# Altium PCB FD-JUL-CB1_PCB.PcbDoc
Units mm, origin at the board's own origin, x right, y up, seen from the top; angles counter-clockwise.
Board outline 11.43 x 8.89 mm, 4 copper layers (Top Layer, Int1 (GND), Layer 1, Bottom Layer), stack 0.752 mm thick; 20 components, 23 nets, 82 pads, 32 vias.
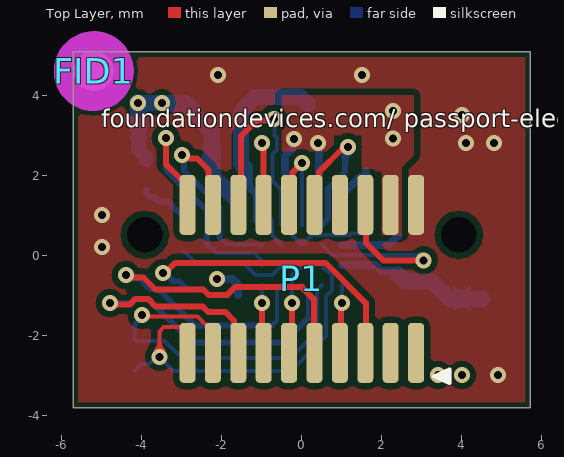
[diagram p0: Top Layer view]
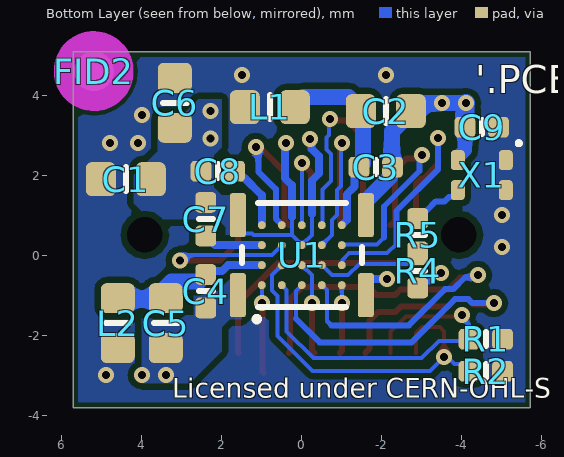
[diagram p1: Bottom Layer view, seen from below]
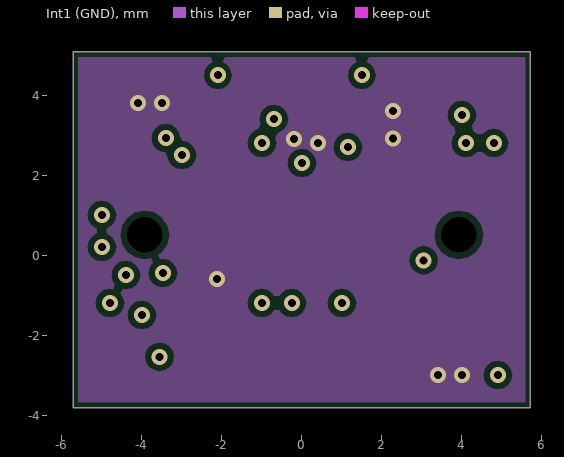
[diagram p2: Int1 (GND)]
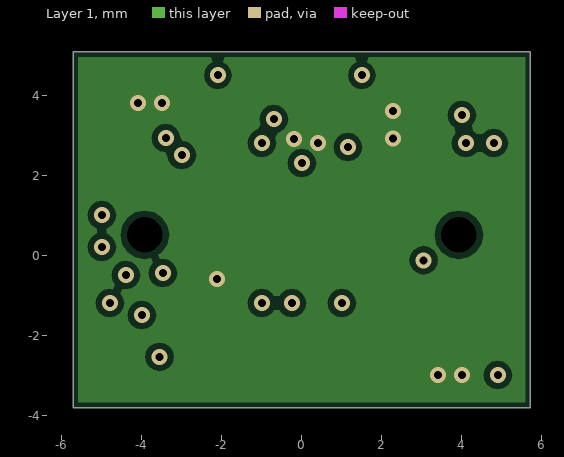
[diagram p3: Layer 1]
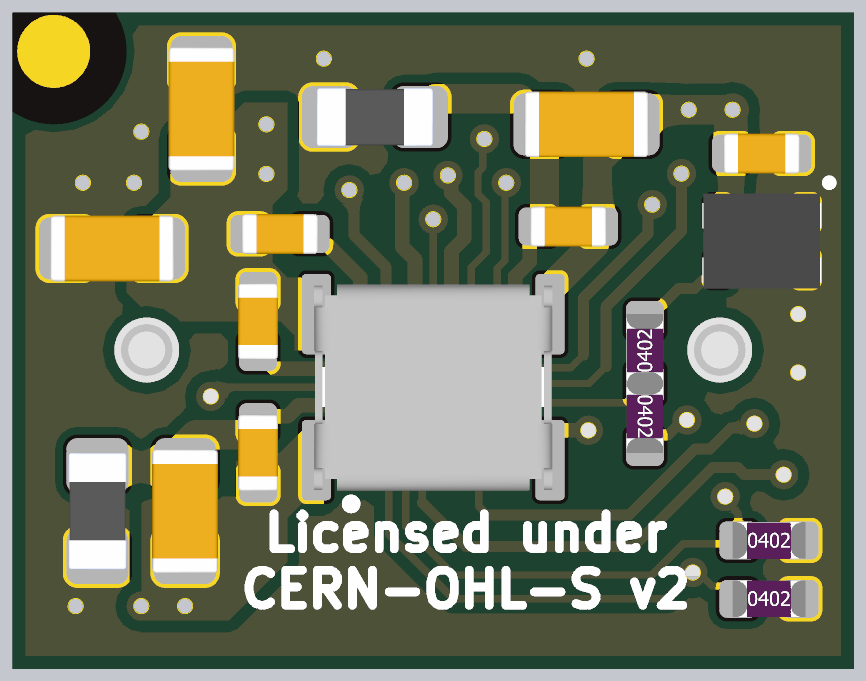
[diagram p4: 3D render of the assembled board from below, using the file's embedded part models]

## Layer stack, top to bottom
Top Solder: solder mask 0.0178, SM-001, Dk 3.9
Top Layer: signal copper 0.0152
Dielectric 1: prepreg 0.0848, PP-017, Dk 3.77
Int1 (GND): signal copper 0.033
Dielectric 3: core 0.4856, Core-039, Dk 4.25
Layer 1: signal copper 0.033
Dielectric 2: prepreg 0.0848, PP-017, Dk 3.77
Bottom Layer: signal copper 0.0152
Bottom Solder: solder mask 0.0178, SM-001, Dk 3.9

## Board outline
-5.715,-3.81 5.715,-3.81 5.715,5.08 -5.715,5.08

## Design rules (kind name [scope] priority, off if disabled: settings)
Clearance Fiducials [InComponent('FID1') or InComponent('FID2') or InComponent('FID3') or InComponent('FID5') or InComponent('FID4') or InComponent('FID6')] p1: gap=0.1 ignorepadtopadclearanceinfootprint=FALSE except(0: Arc-SMDPad) // Self violation of pad and keepout.
Clearance [All] p2: gap=0.1 ignorepadtopadclearanceinfootprint=FALSE except(0.15: Arc-Fill Arc-Poly Arc-Region Track-Fill Track-Poly Track-Region SMDPad-Fill SMDPad-Poly SMDPad-Region THPad-Fill THPad-Poly THPad-Region Via-Fill Via-Poly Via-Region Fill-Fill Fill-Poly Fill-Region Poly-Poly Poly-Region Region-Region)
ComponentClearance "R4 & R5" [InComponent('R4') vs InComponent('R5')] p1: gap=-1 collisioncheckmode=3 verticalgap=-1 showdistances=FALSE // Routing Select Resistors
ComponentClearance [All] p2: gap=0.1 collisioncheckmode=3 verticalgap=0.1 showdistances=FALSE
DiffPairsRouting [All] p1: maxlimit=0.3 minlimit=0.1 mostfreqgap=0.2 toplayer_minwidth=0.1 toplayer_maxwidth=0.3 toplayer_prefwidth=0.2 midlayer1_minwidth=0.1 midlayer1_maxwidth=0.3 midlayer1_prefwidth=0.2 midlayer2_minwidth=0.1 midlayer2_maxwidth=0.3 midlayer2_prefwidth=0.2 bottomlayer_minwidth=0.1 bottomlayer_maxwidth=0.3 bottomlayer_prefwidth=0.2 maxuncoupledlength=12.7
HoleSize [All] p1: absolutevalues=TRUE maxlimit=7.62 minlimit=0.2 maxpercent=80.000 minpercent=20.000
HoleToHoleClearance [All] p1: gap=0.1 allowstackedmicrovias=TRUE
MinimumAnnularRing [All] p1: minimumring=0.1
MinimumSolderMaskSliver [All] p1: minsoldermaskwidth=0.1
PlaneClearance [All] p1: clearance=0.203
PlaneConnect [All] p1: pad.planeconnectstyle=Relief pad.reliefexpansion=0.508 pad.reliefentries=4 pad.reliefconductorwidth=0.254 pad.reliefairgap=0.254 via.planeconnectstyle=Direct via.reliefexpansion=0.508 via.reliefentries=4 via.reliefconductorwidth=0.254 via.reliefairgap=0.254
PolygonConnect [All] p1: thpad.connectstyle=Relief thpad.reliefconductorwidth=0.254 thpad.reliefentries=4 thpad.polygonreliefangle="90 Angle" thpad.airgapwidth=0.254 smdpad.connectstyle=Direct smdpad.reliefconductorwidth=0.254 smdpad.reliefentries=4 smdpad.polygonreliefangle="90 Angle" smdpad.airgapwidth=0.254 via.connectstyle=Direct via.reliefconductorwidth=0.254 via.reliefentries=4 via.polygonreliefangle="90 Angle" via.airgapwidth=0.254
RoutingCorners [All] p1: cornerstyle=45-Degree minsetback=0.2 maxsetback=2
RoutingVias [All] p1: holewidth=0.3 width=0.6 viastyle="Through Hole" minholewidth=0.2 minwidth=0.4 maxholewidth=0.4 maxwidth=0.8
SMDNeckDown [All] p1: percent=100.000
SilkToSilkClearance [All] p1: silktosilkclearance=0.1
SilkToSolderMaskClearance SilkscreenOverComponentPads [IsPad] p1: minsilkscreentomaskgap=0.085 clearancetoexposedcopper=TRUE
SolderMaskExpansion [All] p1: expansion=0.05 istentingtop=FALSE
Width [All] p1: maxlimit=1 minlimit=0.1 preferedwidth=0.1
20 further rules are at their usual default settings.

## Classes and differential pairs
component class Title: PCB1
net class DCMI_D[7..0]: DCMI_D0 DCMI_D1 DCMI_D2 DCMI_D3 DCMI_D4 DCMI_D5 DCMI_D6 DCMI_D7
component class U_Connector: FID1 FID2 P1
component class U_Camera: C1 C2 C3 C4 C5 C6 C7 C8 C9 L1 L2 R1 R2 R4 R5 U1 X1

## Components (designator, comment, footprint, x,y, rotation, side; value= is the part's Value field where it differs from the comment)
C1 "CAP CER 4.7uF 16V 10% X5R 0603" CAPC0603(1608)90_L 4.4,1.9 r180 bottom
C2 "CAP CER 4.7uF 16V 10% X5R 0603" CAPC0603(1608)90_L -2.1,3.6 r180 bottom
C3 "CAP CER 0.1uF 16V 10% X7R 0402" CAPC0402(1005)55_L -1.85,2.2 r180 bottom
C4 "CAP CER 0.1uF 16V 10% X7R 0402" CAPC0402(1005)55_L 2.4,-0.9 r270 bottom
C5 "CAP CER 4.7uF 16V 10% X5R 0603" CAPC0603(1608)90_L 3.4,-1.7 r270 bottom
C6 "CAP CER 4.7uF 16V 10% X5R 0603" CAPC0603(1608)90_L 3.175,3.81 r270 bottom
C7 "CAP CER 0.1uF 16V 10% X7R 0402" CAPC0402(1005)55_L 2.4,0.9 r90 bottom
C8 "CAP CER 0.1uF 16V 10% X7R 0402" CAPC0402(1005)55_L 2.1,2.1 r0 bottom
C9 "CAP CER 0.1uF 16V 10% X7R 0402" CAPC0402(1005)55_L -4.5,3.2 r0 bottom
FID1 "FID1X2R" FID1X2R -5.2,4.6 r90 top
FID2 "FID1X2R" FID1X2R 5.2,4.6 r90 bottom
L1 "BLM18PG221SH1D" FBC0603(1608)90_L 0.8,3.7 r180 bottom
L2 "BLM18PG221SH1D" FBC0603(1608)90_L 4.6,-1.7 r270 bottom
P1 "LSS-110-02-L-DV-A-K" "SMTC - LSS-110-02-L-DV-A_V" 0,-0.592 r0 top
R1 "RES 4.7K 1/16W 1% 0402" RESC0402(1005)_L -4.6,-2.1 r180 bottom
R2 "RES 4.7K 1/16W 1% 0402" RESC0402(1005)_L -4.6,-2.9 r180 bottom
R4 "RES 0 OHM JUMPER 1/16W 0402" RESC0402(1005)_L -2.9,-0.4 r270 bottom locked
R5 "RES 0 OHM JUMPER 1/16W 0402" RESC0402(1005)_L -2.9,0.5 r90 bottom locked
U1 "OVM7690-RYAA" "OMNI - CCBGA-CG-20" 0,0 r90 bottom
X1 "DSC6001HE2A-024.0000" "MCHP - VFLGA-1612-4_L" -4.5,2 r270 bottom

## Footprints (in the part's own frame and the unit in brackets; to place one, negate y for a bottom-side part, rotate by r counter-clockwise, add the part's x,y. Pads: shape width x height; smd on the part's side, far side on the other; paste and mask are expansions set on the pad)
CAPC0402(1005)55_L [mm] "Chip Capacitor, 2-Leads, Body 1.05x0.55mm, IPC High Density"
  rrect40% 0.52x0.52 smd: 1(-0.42,0) 2(0.42,0)
  silkscreen extent 0,-0.17 0,0.18, body extent -0.53,-0.28 0.53,0.27, height 0.55
CAPC0603(1608)90_L [mm] "Chip Capacitor, 2-Leads, Body 1.75x0.95mm, IPC High Density"
  rrect40% 0.75x0.85 smd: 1(-0.625,0) 2(0.625,0)
  silkscreen extent 0,-0.3 0,0.3, body extent -0.85,-0.45 0.85,0.45, height 0.9
FBC0603(1608)90_L [mm] "Chip Ferrite Bead, 2-Leads, Body 1.75x0.95mm, IPC High Density"
  rrect40% 0.75x0.85 smd: 1(-0.625,0) 2(0.625,0)
  silkscreen extent 0,-0.3 0,0.3, body extent -0.8,-0.4 0.8,0.4, height 0.95
FID1X2R [mm] "Fiducial - Round 1x2mm"
  round 1 smd paste-0.5 mask+0.5: 0(0,0)
  Top Layer keep-out circle w1: c0,0 r0.5
"MCHP - VFLGA-1612-4_L" [mm] "DFN, 4-Leads, Body 1.55x1.20mm, Pitch 0.75mm, IPC High Density"
  rrect50% 0.5x0.35 smd: 1(-0.375,0.6) 2(-0.375,-0.6) 3(0.375,-0.6) 4(0.375,0.6)
  silkscreen extent -0.85,0.87 -0.75,0.97, body extent -0.65,-0.81 0.65,0.81, height 0.9
"OMNI - CCBGA-CG-20" [mm] "Omnivision CameraCube"
  rrect30% 1.1x0.4 smd: 1(-1,1.6) 2(-1,-1.6) 3(1,-1.6) 4(1,1.6)
  round 0.2 smd: A1(-0.75,1) A2(-0.25,1) A3(0.25,1) A4(0.75,1) B1(-0.75,0.5) B2(-0.25,0.5) B3(0.25,0.5) B4(0.75,0.5) C1(-0.75,0) C2(-0.25,0) C3(0.25,0) C4(0.75,0) D1(-0.75,-0.5) D2(-0.25,-0.5) D3(0.25,-0.5) D4(0.75,-0.5) E1(-0.75,-1) E2(-0.25,-1) E3(0.25,-1) E4(0.75,-1)
  silkscreen extent -1.63,-1.5 1.3,1.5, body extent -1.42,-1.63 1.41,1.63, height 2.72
RESC0402(1005)_L [mm] "Chip Resistor, 2-Leads, Body 1.00x0.50mm, IPC High Density"
  rrect40% 0.52x0.52 smd: 1(-0.42,0) 2(0.42,0)
  silkscreen extent 0,-0.17 0,0.18, body extent -0.5,-0.25 0.5,0.25, height 0.36
"SMTC - LSS-110-02-L-DV-A_V" [mm]
  rrect50% 0.4x1.5 smd: 1(2.857,-1.85) 2(2.857,1.85) 3(2.222,-1.85) 4(2.222,1.85) 5(1.587,-1.85) 6(1.587,1.85) 7(0.953,-1.85) 8(0.953,1.85) 9(0.318,-1.85) 10(0.318,1.85) 11(-0.318,-1.85) 12(-0.318,1.85) 13(-0.953,-1.85) 14(-0.953,1.85) 15(-1.587,-1.85) 16(-1.587,1.85) 17(-2.222,-1.85) 18(-2.222,1.85) 19(-2.857,-1.85) 20(-2.857,1.85)
  round 0 hole 0.89 unplated: H1(-3.925,1.1) H2(3.925,1.1)
  silkscreen extent 3.31,-2.61 3.7,-2.26, body extent -5.55,-2.3 5.55,2.3, height 7.3

## Part data
C1 C2 C5 C6: library part CMP-CAP-00003-1, "4.7µF ±10% 16V Ceramic Capacitor X5R 0603 (1608 Metric)", Capacitance=4.7uF, Case Code (Imperial)=0603, Case Code (Metric)=1608, Dielectric=X5R, Max Operating Temperature=85°C, Min Operating Temperature=-55°C, Package Quantity=1, Tolerance=10%, Voltage Rating=16V, Case/Package=0603, Composition=Ceramic, Height=0.8mm, Length=1.6mm, Mount="Surface Mount", Number of Pins=2, Packaging="Tape and Reel", REACH SVHC="No SVHC", Termination=SMD/SMT, Thickness=0.035inch, Voltage Rating (DC)=16V, Width=0.8mm
C3 C4 C7 C8 C9: library part CMP-CAP-00002-2, "0.1µF ±10% 16V Ceramic Capacitor X7R 0402 (1005 Metric)", Capacitance=100nF, Case Code (Imperial)=0402, Case Code (Metric)=1005, Dielectric=X7R, Dielectric Material=Ceramic, Insulation Resistance=10GR, Max Operating Temperature=125°C, Min Operating Temperature=-55°C, Package Quantity=1, Tolerance=10%, Voltage=16V, Case/Package=0402, Depth=0.5mm, Height=0.5mm, Lead Free="Lead Free", Length=1mm, Material=Ceramic, Mount="Surface Mount", Number of Pins=2, Packaging="Tape and Reel", Radiation Hardening=No, REACH SVHC="No SVHC", Termination=SMD/SMT, Thickness=0.022inch, Voltage Rating=16V, Voltage Rating (DC)=16V, Width=0.5mm
FID1 FID2: library part CMP-MECH-00000-3, "Fiducial - Round 1x2mm", Pins=0
L1 L2: library part CMP-FLT-0001-1, "FERRITE BEAD 220 OHM 0603 1LN", Case Code (Imperial)=0603, Case Code (Metric)=1608, Current Rating=1.4A, DC Resistance (DCR)=100mR, Max Operating Temperature=125°C, Min Operating Temperature=-55°C, Package Quantity=4000, Ratings=AEC-Q200, Test Frequency=100MHz, Tolerance=25%, Case/Package=0603, ComponentLink1Description=Datasheet, ComponentLink1URL=https://www.murata.com/en-us/products/productdata/8796737273886/QNFA9101.pdf, Core Material=Ferrite, Depth=0.95mm, Height=0.037inch, Impedance=220R, Lead Free="Lead Free", Length=0.063inch, Max Current Rating=1.4A, Max DC Current=1.4A, Mount="Surface Mount", Number of Circuits=1, Number of Lines=1, Packaging="Tape and Reel", REACH SVHC="No SVHC", Termination=SMD/SMT, Width=0.8mm
P1: library part CMP-CON-0021-3, "20 Position Connector Self Mating, Non-Gendered Surface Mount Gold", Contact Plating=Gold, Number of Contacts=20, Number of Rows=2, Packaging=Bulk, Pitch=0.635mm, Radiation Hardening=No, Termination=Solder
R1 R2: library part CMP-RES-00002-3, "4.7 kOhms ±1% 0.063W, 1/16W Chip Resistor 0402 (1005 Metric) Automotive AEC-Q200 Thick Film", Case Code (Imperial)=0402, Case Code (Metric)=1005, Max Operating Temperature=155°C, Max Power Dissipation=63mW, Min Operating Temperature=-55°C, Package Quantity=10, Resistance=4.7k, Temperature Coefficient=100ppm/°C, Tolerance=1%, Voltage Rating=50V, Case/Package=0402, Composition="Thick Film", Contact Plating=Tin, Depth=0.5mm, Features="Automotive AEC-Q200", Height=0.35mm, Lead Free="Lead Free", Length=1mm, Military Standard=Not, Mount="Surface Mount", Number of Terminations=2, Packaging="Tape and Reel", Power Rating=63mW, Radiation Hardening=No, REACH SVHC=Unknown, Termination=SMD/SMT, Voltage Rating (DC)=50V, Weight=2.3E-05oz, Width=0.5mm
R4 R5: library part CMP-RES-00014-4, "0 Ohms Jumper 0.063W, 1/16W Chip Resistor 0402 (1005 Metric)", Case Code (Imperial)=0402, Case Code (Metric)=1005, Max Operating Temperature=155°C, Max Power Dissipation=63mW, Min Operating Temperature=-55°C, Package Quantity=1, Power Rating=62.5mW, Resistance=0, Temperature Coefficient=200ppm/°C, Tolerance=5%, Voltage Rating=50V, Case/Package=0402, Composition="Thick Film", Contact Plating=Tin,Matte, Depth=0.5mm, Features="Moisture Resistant", Height=0.016inch, Lead Free="Lead Free", Length=1mm, Military Standard=Not, Number of Terminations=2, Packaging="Tape and Reel", Radiation Hardening=No, REACH SVHC=Unknown, Termination=SMD/SMT, Width=0.02inch
U1: library part CMP-SEN-0001-10, "SENSOR CAMERA CMOS 20CAMERACUBE", Max Operating Temperature=70°C, Min Operating Temperature=-30°C, Package Quantity=2500, Number of Pins=20, Packaging="Tape and Reel"
X1: library part CMP-XTAL-0002-1, "XO (Standard) CMOS Oscillator 1.8V ~ 3.3V Enable/Disable 4-SMD, No Lead", Case/Package=SMD/SMT, Frequency=24MHz, Frequency Stability=25ppm, Max Operating Temperature=70°C, Max Supply Current=1.3mA, Min Operating Temperature=-20°C, Ratings=AEC-Q100, ComponentLink1Description=Datasheet, ComponentLink1URL=https://ww1.microchip.com/downloads/en/DeviceDoc/DSC60XX-Ultra-Small-Ultra-Low-Power-MEMS-Oscillator-DS20005625C.pdf, Mount="Surface Mount", Packaging=Bag

## Via types
v1: diameter 0.4, hole 0.2, Top Layer to Bottom Layer, tented both sides, 32 vias

## Nets (pads, with @x,y where several pads share a name; then routed paths per layer and width w, separated by ;. In a path a pad name is that pad's centre, name@x,y a point inside that pad or via, vN(x,y) a via of type N, cw(c..) or ccw(c..) an arc to the next point about the centre after c; other vN are vias at no path point)
+3V0: C1.1 C6.1 C9.1 L1.1 L2.2 P1.2 R1.2 R2.2 X1.1 X1.4
  other v1: 4.9,-3 -5,0.2 -5,1 4.1,2.8 4.8,2.8 4,3.5 -2.1,4.5 1.5,4.5
+DCMI_AVDD: C4.1 C5.1 L2.1 U1.A2 | length 3.8
  Bottom Layer w0.2: U1.A2 1.352,-0.25 1.848,-0.25 1.997,-0.399 C4.1@2.399,-0.399
  Bottom Layer w0.4: C4.1 2.572,-0.652 3.252,-0.652 3.7,-1.1 L2.1@4.5,-1.1
+DCMI_DOVDD: C2.1 C3.1 L1.2 U1.E4 | length 5
  Bottom Layer w0.2: C3.1@-1.382,2.2 -1.322,2.14 -1.322,1.72 -1.125,1.523 -1.125,0.875 U1.E4
  Bottom Layer w0.4: C3.1@-1.42,2.19 -1.525,2.295 -1.525,3.55 C2.1 -1.475,3.65 -1.173,3.952 -0.027,3.952 L1.2@0.15,3.775
DCMI_D0: P1.6 U1.B3 | length 5.3
  Top Layer w0.15: P1.6 1.6,1.246 1.6,0.308 2.035,-0.127 v1(3.048,-0.127)
  Bottom Layer w0.1: U1.B3 0.75,0 2.921,0 v1(3.048,-0.127)
DCMI_D1: P1.10 U1.B4 | length 4.6
  Top Layer w0.15: P1.10@0.318,0.75 0.427,0.86 0.427,2.077 0.993,2.643 1.093,2.643 v1(1.15,2.7)
  Bottom Layer w0.15: U1.B4 0.5,0.764 0.65,0.914 0.65,1.65 1.085,2.085 1.085,2.635 v1(1.15,2.7)
DCMI_D2: P1.12 U1.C4 | length 2.7
  Top Layer w0.15: P1.12 -0.228,1.348 -0.228,2.072 v1(0,2.3)
  Bottom Layer w0.1: U1.C4 v1(0,2.3)
DCMI_D3: P1.16 U1.D4 | length 5.6
  Top Layer w0.15: P1.16 -1.525,1.321 -1.525,2.975 -1.13,3.37 -0.73,3.37 v1(-0.7,3.4)
  Bottom Layer w0.1: v1(-0.7,3.4) -0.678,3.378 -0.678,3.009 -0.614,2.944 -0.614,2.641 -0.727,2.527 -0.727,1.85 -0.519,1.642 -0.519,0.769 U1.D4
DCMI_D4: P1.18 U1.E3 | length 5.8
  Top Layer w0.15: v1(-3,2.5) -2.919,2.5 -2.838,2.42 -2.62,2.42 -2.332,2.132 -2.332,0.86 P1.18@-2.222,0.75
  Bottom Layer w0.1: -2.055,0.438 -1.884,0.267 -1.017,0.267 U1.E3
  Bottom Layer w0.15: v1(-3,2.5) -2.943,2.443 -2.943,2.103 -2.055,1.216 -2.055,0.438
DCMI_D5: P1.14 U1.D3 | length 4.8
  Top Layer w0.15: v1(-1,2.8) -0.953,2.752 P1.14@-0.953,0.75
  Bottom Layer w0.1: v1(-1,2.8) -0.983,2.783 -0.983,1.734 -0.875,1.626 -0.875,1.005 -0.75,0.88 -0.75,0.5 U1.D3
DCMI_D6: P1.20 U1.E2 | length 7.2
  Top Layer w0.15: v1(-3.4,2.925) -3.4,2.275 -3.043,1.918 -2.981,1.918 -2.857,1.795 P1.20@-2.857,0.75
  Bottom Layer w0.1: -2.369,0.282 -2.136,0.05 -1.187,0.05 -1.019,-0.117 -1.019,-0.231 U1.E2
  Bottom Layer w0.15: v1(-3.4,2.925) -3.4,2.138 -2.369,1.106 -2.369,0.282
DCMI_D7: P1.13 U1.E1 | length 1.7
  Top Layer w0.15: v1(-1,-1.2) -1,-2.394 P1.13
  Bottom Layer w0.1: v1(-1,-1.2) U1.E1
DCMI_HREF: P1.15 U1.C1 | length 10.8
  Top Layer w0.15: v1(-4.8,-1.2) -4.763,-1.237 -4.303,-1.237 -4.159,-1.093 -3.841,-1.093 -3.647,-1.287 -2.475,-1.287 -2.344,-1.418 -1.913,-1.418 -1.697,-1.634 -1.697,-2.332 P1.15
  Bottom Layer w0.1: U1.C1 0.15,-0.9 0.15,-1.582
  Bottom Layer w0.15: v1(-4.8,-1.2) -4.266,-1.2 -4.166,-1.1 -3.83,-1.1 -2.749,-2.181 -0.449,-2.181 0.15,-1.582
DCMI_PCLK: P1.9 U1.D1 | length 11.7
  Top Layer w0.15: v1(-4.4,-0.5) -4.343,-0.557 -4.13,-0.557 -3.957,-0.558 -3.658,-0.857 -2.467,-0.857 -2.332,-0.992 -1.863,-0.992 -1.671,-0.8 0,-0.8 0.3,-1.1 0.3,-2.424 P1.9
  Bottom Layer w0.1: -0.742,-1.753 -0.625,-1.636 -0.625,-0.875 U1.D1
  Bottom Layer w0.15: v1(-4.4,-0.5) -4.343,-0.557 -4.081,-0.557 -3.788,-0.85 -3.582,-0.85 -2.679,-1.753 -0.742,-1.753
DCMI_PWDN: P1.7 U1.A1 | length 2.2
  Top Layer w0.15: P1.7@0.953,-2.95 0.976,-2.926 0.976,-1.224 v1(1,-1.2)
  Bottom Layer w0.1: v1(1,-1.2) U1.A1
DCMI_SCL: P1.19 R2.1 U1.B2 | length 9.3
  Top Layer w0.1: v1(-3.556,-2.54) -3.556,-1.905 -3.451,-1.8 -3.004,-1.8 -2.857,-1.946 P1.19
  Bottom Layer w0.1: R2.1 -4.003,-2.723 -3.821,-2.723 -3.637,-2.54 v1(-3.556,-2.54) -3.556,-2.545 -3.203,-2.899 -0.273,-2.899 0.61,-2.015 0.61,-1.022 0.75,-0.882 0.75,-0.5 U1.B2
DCMI_SDA: P1.17 R1.1 U1.B1 | length 9.4
  Top Layer w0.1: v1(-4,-1.5) -3.967,-1.533 -2.602,-1.533 -2.222,-1.912 P1.17
  Bottom Layer w0.1: v1(-4,-1.5) -4,-1.554 -4.18,-1.734 R1.1 -4.135,-2.145 -3.427,-2.145 -2.997,-2.575 -0.288,-2.575 0.378,-1.909 0.378,-0.872 U1.B1
DCMI_VREF1: C8.1 U1.A4 | length 1.6
  Bottom Layer w0.2: U1.A4 1,1.5 1.442,1.942 1.52,1.942 1.6,2.022 C8.1@1.6,2.1
DCMI_VREF2: C7.1 U1.A3 | length 1.5
  Bottom Layer w0.2: U1.A3 2.168,0.25 2.398,0.48 C7.1
DCMI_VSYNC: P1.11 U1.C2 | length 2.3
  Top Layer w0.15: P1.11 -0.25,-2.374 v1(-0.25,-1.2)
  Bottom Layer w0.1: v1(-0.25,-1.2) -0.25,-0.5 U1.C2
DCMI_XVCLK: P1.5 R4.2 | length 7.6
  Top Layer w0.15: v1(-3.475,-0.45) -3.419,-0.45 -3.161,-0.192 0.592,-0.192 1.6,-1.2 1.6,-2.429 P1.5
  Bottom Layer w0.15: v1(-3.475,-0.45) -3.419,-0.45 -3.216,-0.653 -3.067,-0.653 R4.2
DCMI_XVCLK_R: R4.1 R5.1 U1.D2 | length 2.8
  Bottom Layer w0.1: R4.1@-2.95,0.075 -2.926,0.075 -2.635,-0.216 -1.437,-0.216 -1.153,-0.5 -0.75,-0.5 U1.D2
EXT_XVCLK: R5.2 X1.3 | length 1.3
  Bottom Layer w0.15: X1.3 -3.9,1.557 -3.801,1.458 -3.684,1.458 -3.574,1.348 -3.354,1.348 -3.111,1.105 -3.101,1.105 -2.916,0.92 R5.2
GND: C1.2 C2.2 C3.2 C4.2 C5.2 C6.2 C7.2 C8.2 C9.2 P1.4 U1.1 U1.2 U1.3 U1.4 U1.C3 X1.2 | length 14
  Bottom Layer w0.1: -0.25,1.025 -0.25,0.5 U1.C3 0.25,0.5 ; 0.25,0.95 0.25,0.5 ; U1.4 1.6,0.694 1.451,0.545 1.245,0.545 1.201,0.5 0.25,0.5
  Bottom Layer w0.2: v1(-2.125,-0.592) -1.733,-0.592 -1.6,-0.725 U1.2 ; -0.25,1.025 -0.25,1.863 -0.425,2.038 -0.425,2.476 -0.248,2.653 -0.248,2.852 v1(-0.2,2.9) ; 0.25,0.95 0.25,1.75 0.425,1.925 0.425,2.775 v1(0.4,2.8)
  Bottom Layer w0.35: C9.2 -4.08,2.63 -3.9,2.45 X1.2
  Bottom Layer w0.4: v1(-4.1,3.8) v1(-3.5,3.8) v1(-3.5,3.8) -2.9,3.799 -2.725,3.624 C2.2 ; C2.2@-2.534,3.375 -2.25,3.091 -2.25,2.22 C3.2 -2.21,2.14 -2.21,1.96 -1.6,1.35 U1.3
  Bottom Layer w0.45: v1(-4.1,3.8) -4.08,3.78 C9.2
  other v1: 3.4,-3 4,-3 2.286,2.921 2.286,3.6
pads on no net: FID1.0 FID2.0 P1.1 P1.3 P1.8 P1.H1 P1.H2

## Polygon pours and split planes (outlines as drawn)
+3V0 on Bottom Layer "S" (solid, remove dead copper, pour order 4): -5.588,4.953 5.588,4.953 5.588,-3.683 -5.588,-3.683
GND on Bottom Layer "GND_2" (solid, remove dead copper, pour order 2): 1.5,0.5 1.9,0.5 1.9,0.7 2.1,0.9 3.8,0.9 4.2,1.3 4.2,2 3.6,2.6 3.6,3.4 3.5,3.5 2.994,3.5 2.594,3.9 2,3.9 2,2.7 2.2,2.5 2.2,1.7 2,1.5 1.5,1.5
GND on Bottom Layer "GND_1" (solid, remove dead copper, pour order 1): 1.5,-0.6 1.8,-0.6 2.1,-0.9 2.7,-0.9 2.7,-1.5 4,-1.5 4,-3.2 2.8,-3.2 2,-2.4 2,-1.8 1.8,-1.6 1.5,-1.6
GND on Top Layer "GND_L01_P005" (solid, remove dead copper, pour order 5): 2.5,0.5 2.5,2.2 2.8,2.5 2.8,4 -0.5,4 -0.5,2.6 0.8,2.6 0.8,3 1.5,3 1.5,2.1 2,2.1 2,0.5
+3V0 on Top Layer "S" (solid, remove dead copper, pour order 7): -5.588,4.953 5.588,4.953 5.588,-3.683 -5.588,-3.683
GND on Layer 1 "GND_L03_P008" (solid, remove dead copper, pour order 8): -5.588,4.953 5.588,4.953 5.588,-3.683 -5.588,-3.683
GND on Int1 (GND) "GND_L02_P009" (solid, remove dead copper, pour order 9): -5.588,4.953 5.588,4.953 5.588,-3.683 -5.588,-3.683

## Other copper
Top Layer:
  text "L1 - PRIMARY SIDE" at -11.35,14.25 h1
Int1 (GND):
  text "L2 - GND" at -11.33,14.232 h1
Layer 1:
  text "L3 - GND" at -11.35,14.25 h1
Bottom Layer:
  text "L4 - SECONDARY SIDE" at -11.35,14.25 h1

## Silkscreen, mask and mechanical layers (free items; w line width, h text height)
Top Overlay:
  text "TOP OVERLAY" at -11.35,14.25 h1
  text "foundationdevices.com/ passport-electronics" at -5.015,3.2 h0.45
Bottom Overlay:
  text "BOTTOM OVERLAY" at -11.35,14.25 h1
  text "'.PCB_REV'" at -4.333,4.05 h0.7
  text "Licensed under CERN-OHL-S v2" at 3.24,-3.566 h0.48
Top Paste:
  text "TOP PASTE" at -11.35,14.25 h1
Bottom Paste:
  text "BOTTOM PASTE" at -11.35,14.25 h1
Top Solder:
  text "TOP SOLDERMASK" at -11.35,14.25 h1
Bottom Solder:
  text "BOTTOM SOLDERMASK" at -11.35,14.25 h1
Board:
  the board outline again, w0.1
Route Tool Path:
  text "BOARD ROUTE" at -11.35,14.25 h1
Dimensions:
  circle w0.1: c3.925,0.508 r0.445
  circle w0.1: c-3.925,0.508 r0.445
  text "DIMENSIONS" at -11.35,14.25 h1
Fab Notes:
  lines w0.2: -106.325,0.25 -98.705,0.25 ; -106.325,95.5 -98.705,95.5 ; -106.325,190.75 -98.705,190.75 ; -21.658,-95 -21.658,-87.38 ; 35.9,6.939 110.4,7.114 ; 35.9,10.829 110.4,11.091 ; 63.008,-95 63.008,-87.38 ; 147.675,-95 147.675,-87.38 ; 232.342,-95 232.342,-87.38 ; 246.735,278.38 246.735,273.3 ; 251.775,-82.3 282.295,-82.3 ; 251.775,-60.5 282.275,-60.5 ; 251.8,-87 251.8,-49.2 282.295,-49.2 394.055,-49.2 ; 251.8,-72.1 282.295,-72.1 ; 256.775,263.3 256.775,273.4 ; 282.295,-87.38 282.295,-82.3 ; 282.295,-76.6 282.295,-56.9 282.295,-49.5 ; 282.295,-61.98 394.055,-61.98 ; 294.995,-82.3 294.995,-72.14 ; 305.155,-87.38 305.155,-82.3 ; 317.008,-95 317.008,-87.38 ; 345.795,-61.98 345.795,-49.5 ; 348.335,-87.38 348.335,-82.3 ; 348.395,-82.3 348.395,-72.14 ; 349.375,263.3 349.375,273.4 ; 371.195,263.3 371.195,273.4 ; 383.895,-82.3 383.895,-72.14 ; 394.055,-82.3 282.295,-82.3 ; 394.055,-72.1 282.295,-72.1 ; 394.055,0.25 401.675,0.25 ; 394.055,95.5 401.675,95.5 ; 394.055,190.75 401.675,190.75 ; 394.055,263.14 246.735,263.14 246.735,268.22 ; 394.055,268.22 246.735,268.22 ; 394.055,273.3 246.735,273.3 ; 246.735,268.22 246.735,273.3 ; 282.295,-82.3 282.295,-72.1 ; -106.325,-95 -106.325,286 401.675,286 401.675,-95 -106.325,-95 ; -98.705,-87.38 394.055,-87.38 394.055,278.38 -98.705,278.38 -98.705,-87.38 ; -21.658,278.38 -21.658,286 -21.658,278.38 ; 33.4,-15.5 33.4,17 113.4,17 113.4,-15.5 33.4,-15.5 ; 63.008,278.38 63.008,286 63.008,278.38 ; 147.675,278.38 147.675,286 147.675,278.38 ; 179.9,-43.8 179.9,31.2 387.4,31.2 387.4,-43.8 179.9,-43.8 ; 232.342,278.38 232.342,286 232.342,278.38 ; 317.008,278.38 317.008,286 317.008,278.38
  text "1" at -65.325,279.63 h5.08
  text "2" at 23.425,279.63 h5.08
  text "3" at 107.425,279.63 h5.08
  text "4" at 188.675,279.63 h5.08
  text "6" at 358.675,279.63 h5.08
  text "5" at 272.925,279.38 h5.08
  text "REVISIONS" at 311.925,274.25 h3
  text "DESCRIPTION" at 293.425,269.75 h2
  text "DATE" at 356.425,269.75 h2
  text "APPROVED" at 374.925,269.75 h2
  text "REV" at 248.825,269.45 h2
  text "NOTES: (UNLESS OTHERWISE SPECIFIED)" at -90.893,266.869 h2.54
  text "M. Beach" at 373.525,264.55 h2
  text "C1" at 250.15,264.25 h2
  text "Release for Production" at 257.925,264.25 h2
  text "11/09/2020" at 350.425,264.25 h2
  text "1. THIS DRAWING SPECIFIES THE REQUIREMENTS FOR A PRINTED CIRCUIT BOARD" at -90.893,259.869 h2.54
  text "IN ACCORDANCE WITH SPECIFICATION IPC-6012 CLASS 2 (LATEST REVISION)." at -87.893,255.869 h2.54
  text "2. THE PCB MUST BE LEAD FREE ASSEMBLY PROCESS COMPATIBLE AND MUST BE ABLE TO HANDLE" at -90.893,249.869 h2.54
  text "A MINIMUM OF 5 CYCLES AT 260 DEGREES CELSIUS FOR 10 SECONDS." at -87.893,245.869 h2.54
  text "3. BASE MATERIAL - LAMINATE AND PREPREG SHALL MEET IPC-4101E/124 or /129" at -90.893,239.869 h2.54
  text "A" at -104.805,236.72 h6.35
  text "A" at 395.575,236.72 h6.35
  text "TG - MUST BE GREATER THAN OR EQUAL TO 150 DEGREES CELSIUS." at -87.893,235.869 h2.54
  text "TD - MUST BE GREATER THAN OR EQUAL TO 325 DEGREES CELSIUS." at -87.893,231.869 h2.54
  text "4. COPPER FOIL WEIGHT -  SEE STACKUP DETAIL 'A'" at -90.893,225.869 h2.54
  text "5. MINIMUM CONDUCTIVE WIDTH/SPACING TO BE 0.1mm/0.1mm" at -90.893,219.869 h2.54
  text "6. PLATING FINISH: ENIG" at -90.893,213.869 h2.54
  text "7. SOLDERMASK - TO MEET THE REQUIRMENTS OF IPC-SM-840E (OR LATEST REVISION)." at -90.893,207.869 h2.54
  text "- BLACK COLOR. BOTH SIDES." at -87.893,203.869 h2.54
  text "- SOLDERMASK ON SOLDERABLE SURFACES IS PROHIBITED." at -87.893,199.869 h2.54
  text "- ALL CIRCUITRY DEFINED AS COVERED SHALL NOT BE EXPOSED." at -87.893,195.869 h2.54
  text "8. SILKSCREEN - WHITE EPOXY OR ACRYLIC INK. BOTH SIDES. NO SILKSCREEN ON ANY EXPOSED COPPER FEATURE." at -90.893,189.869 h2.54
  text "9. REMOVE ALL NON-FUNCTIONAL INNER LAYER PADS." at -90.893,183.869 h2.54
  text "10. ELECTRICAL TEST - 100% IPCD356." at -90.893,177.869 h2.54
  text "11. DFM CHECK MUST BE RUN ON BOARD DATA BEFORE BUILDING BOARDS." at -90.893,171.869 h2.54
  text "UNLESS PRIOR APPROVAL IS GIVEN IN WRITING BY FOUNDATION." at -87.893,167.869 h2.54
  text "12. TEARDROPS MAY BE ADDED AT THE FAB HOUSE TO ALL SIGNAL LAYERS." at -90.893,161.869 h2.54
  text "13. VIA TENTING - ALL VIAS ON BOTH SIDES MUST HAVE TENTING" at -90.893,155.869 h2.54
  text "14. FINISHED PCB THICKNESS IS CRITICAL: FROM L1 PAD TO L2 PAD TO BE 0.8mm +/- 10%" at -90.893,149.869 h2.54
  text "15. TWO SOLDER SAMPLES TO BE PROVIDED" at -90.893,143.869 h2.54
  text "B" at -104.805,141.47 h6.35
  text "B" at 395.575,141.47 h6.35
  text "16. SUPPLIER MARKINGS - ON SECONDARY SIDE ONLY." at -90.893,137.869 h2.54
  text "- MUST BE UL RECOGNIZED AND MUST HAVE AN ID THAT CONFORMS TO UL94V-0" at -87.893,133.869 h2.54
  text "C" at -104.805,46.22 h6.35
  text "C" at 395.575,46.22 h6.35
  text "Layer Stack-Up (Detail A)" at 35.9,12.034 h2.2
  text "Layer" at 35.9,9.379 h0.9
  text "Gerber" at 72.202,9.379 h0.9
  text "Copper" at 85.517,9.379 h0.9
  text "Insulator" at 100.303,9.379 h0.9
  text "Name" at 35.9,7.579 h0.9
  text "Document" at 72.202,7.579 h0.9
  text "Thickness" at 85.517,7.579 h0.9
  text "Thickness" at 100.303,7.579 h0.9
  text "Top Solder Mask" at 35.9,5.046 h1.25
  text "(.GTS)" at 72.202,5.046 h1.25
  text "0.5oz Plated Copper Foil" at 39.9,1.5 h1.25
  text "L1" at 35.9,1.459 h1.25
  text "(.GTL)" at 72.202,1.459 h1.25
  text "2.0mil" at 85.517,1.459 h1.25
  text "3.34mil" at 100.303,-0.335 h1.25
  text "1.0oz Copper" at 39.9,-2 h1.25
  text "L2" at 35.9,-2.129 h1.25
  text "(.G1)" at 72.202,-2.129 h1.25
  text "1.3mil" at 85.517,-2.129 h1.25
  text "18.72mil" at 100.303,-3.922 h1.25
  text "1.0oz Copper" at 39.9,-5.5 h1.25
  text "L3" at 35.9,-5.716 h1.25
  text "(.G2)" at 72.202,-5.716 h1.25
  text "1.3mil" at 85.517,-5.716 h1.25
  text "3.34mil" at 100.303,-7.509 h1.25
  text "L4" at 35.9,-9.303 h1.25
  text "(.GBL)" at 72.202,-9.303 h1.25
  text "2.0mil" at 85.517,-9.303 h1.25
  text "0.5oz Plated Copper Foil" at 39.9,-9.5 h1.25
  text "Bottom Solder Mask" at 35.9,-13 h1.25
  text "(.GBS)" at 71.9,-13 h1.25
  text "Total Board Thickness:" at 35.9,-17.5 h1.25
  text "32mil" at 85.517,-17.803 h1.25
  text "LICENCE: CERN-OHL-S v2 /  / SPDX-FileCopyrightText: 2020 Foundation Devices, Inc. <hello@foundationdevices.com> / SPDX-License-Identifier: CERN-OHL-S-2.0 /  / You may redistribute and modify this source and make products using it  / under the terms of the CERN-OHL-S v2 (https://ohwr.org/cern_ohl_s_v2.txt). /  / This source is distributed WITHOUT ANY EXPRESS OR IMPLIED WARRANTY,  / INCLUDING OF MERCHANTABILITY, SATISFACTORY QUALITY AND FITNESS FOR A  / PARTICULAR PURPOSE. Please see the CERN-OHL-S v2 for applicable conditions. /  / Source location: foundationdevices.com/passport-electronics /  / As per CERN-OHL-S v2 section 4, should You produce hardware based on this  / source, You must where practicable and applicable maintain the Source Location  / visible (1) on the packaging of the hardware, (2) on the circuit board(s) via  / silkscreen or copper, (3) in any documentation, and (4) on other products you / make using this source." at 182.4,-41.3 h2.54
  text "D" at -104.805,-50.3 h6.35
  text "D" at 395.575,-50.3 h6.35
  text "Foundation Devices Inc." at 347.05,-53.25 h2
  text "DRAWN BY" at 254.025,-54.55 h2
  text "6 Liberty Square #6018" at 347.05,-56.984 h2
  text "FOUNDATION" at 285.284,-58.55 h6
  text "'.PCB_ENGINEER'" at 257.825,-58.95 h2
  text "Boston, MA 02109" at 347.05,-60.584 h2
  text "PCB PART NUMBER:" at 284.385,-65.95 h2
  text "CHECKED BY" at 253.325,-66.35 h2
  text "'.PCB_CHECKER_APP_DATE'" at 258.325,-70.35 h2
  text "'.PCB_PART_NUMBER'" at 284.525,-70.75 h3
  text "SIZE" at 284.025,-75.75 h2
  text "DATE:" at 296.025,-75.75 h2
  text "VARIANT:" at 349.027,-75.75 h2
  text "REV" at 386.025,-75.75 h2
  text "APPROVED BY" at 253.325,-76.65 h2
  text "'.ModifiedDate'" at 313.525,-79.25 h3
  text "'.VariantName'" at 356.445,-80.25 h2
  text "C" at 287.119,-80.58 h3
  text "'.PCB_ENGINEER_APP_DATE'" at 258.325,-80.65 h2
  text "'.PCB_REV'" at 387.768,-80.767 h3
  text "SHEET" at 350.175,-86.25 h2
  text "1" at 366.425,-86.25 h2
  text "OF" at 374.425,-86.25 h2
  text "1" at 386.175,-86.25 h2
  text "SCALE: 1/1" at 284.385,-86.27 h2
  text "DO NOT SCALE DRAWING" at 307.245,-86.27 h2
  text "1" at -65.325,-93.75 h5.08
  text "2" at 23.425,-93.75 h5.08
  text "3" at 107.425,-93.75 h5.08
  text "4" at 188.675,-93.75 h5.08
  text "6" at 358.675,-93.75 h5.08
  text "5" at 272.925,-94 h5.08
Bottom Designator:
  lines w0.1: -18.45,13.25 22.55,13.25 ; -18.45,16.25 22.55,16.25 ; -7.45,10.25 -7.45,13.25 ; 10.55,10.25 10.55,13.25 ; -18.45,10.25 -18.45,16.75 -18.45,19.25 -15.95,19.25 22.55,19.25 22.55,10.25 -18.45,10.25
  text "FOUNDATION DEVICES" at -15.778,20.35 h2
  text "PCB PART NUMBER:" at -17.35,17.35 h1
  text "'.PCB_PART_NUMBER'" at -0.453,17.225 h1
  text "LAYER:" at -17.35,14.35 h1
  text "REVISION:" at -17.35,11.35 h0.75
  text "'.PCB_REV'" at -10.35,11.35 h0.75
  text "VARIANT:" at -6.35,11.35 h0.75
  text "'.VariantName'" at -0.35,11.35 h0.75
  text "DATE:" at 11.65,11.35 h0.75
  text "'.ModifiedDate'" at 15.65,11.35 h0.75
Top Assembly:
  text "TOP ASSEMBLY" at -11.35,14.25 h1
Bottom Assembly:
  text "BOTTOM ASSEMBLY" at -11.35,14.25 h1
Top Courtyard:
  text "TOP COURTYARD" at -11.1,14.25 h1
Bottom Courtyard:
  text "BOTTOM COURTYARD" at -11.1,14.25 h1
Top 3D Body:
  text "TOP 3D BODY" at -11.35,14.25 h1
Bottom 3D Body:
  text "BOTTOM 3D BODY" at -11.35,14.25 h1

## Dimensions
3.925,0.508 to 6.5,-1.2 on Dimensions
-3.925,0.508 to 3.925,0.508 on Dimensions
-5.715,5.08 to -5.715,-3.81 on Dimensions
5.715,-3.81 to -5.715,-3.81 on Dimensions

## Text inside footprints (layer, text, board x,y; h text height)
P1: Top Assembly "2" at 2.675,0.908 h0.5; Top Assembly "1" at 2.775,-2.567 h0.5
U1: Bottom Assembly "SMT TAB: ->" at 1.225,-0.675 h0.15 r270